# Altium PCB AT_START_WB415_V1.1.pcbdoc (part 1 of 2)
Units mil, origin at the board's own origin, x right, y up, seen from the top; angles counter-clockwise.
Board outline 4474.57 x 4041.5 mil, 2 copper layers (Top Layer, Bottom Layer); 120 components, 101 nets, 415 pads, 791 vias.
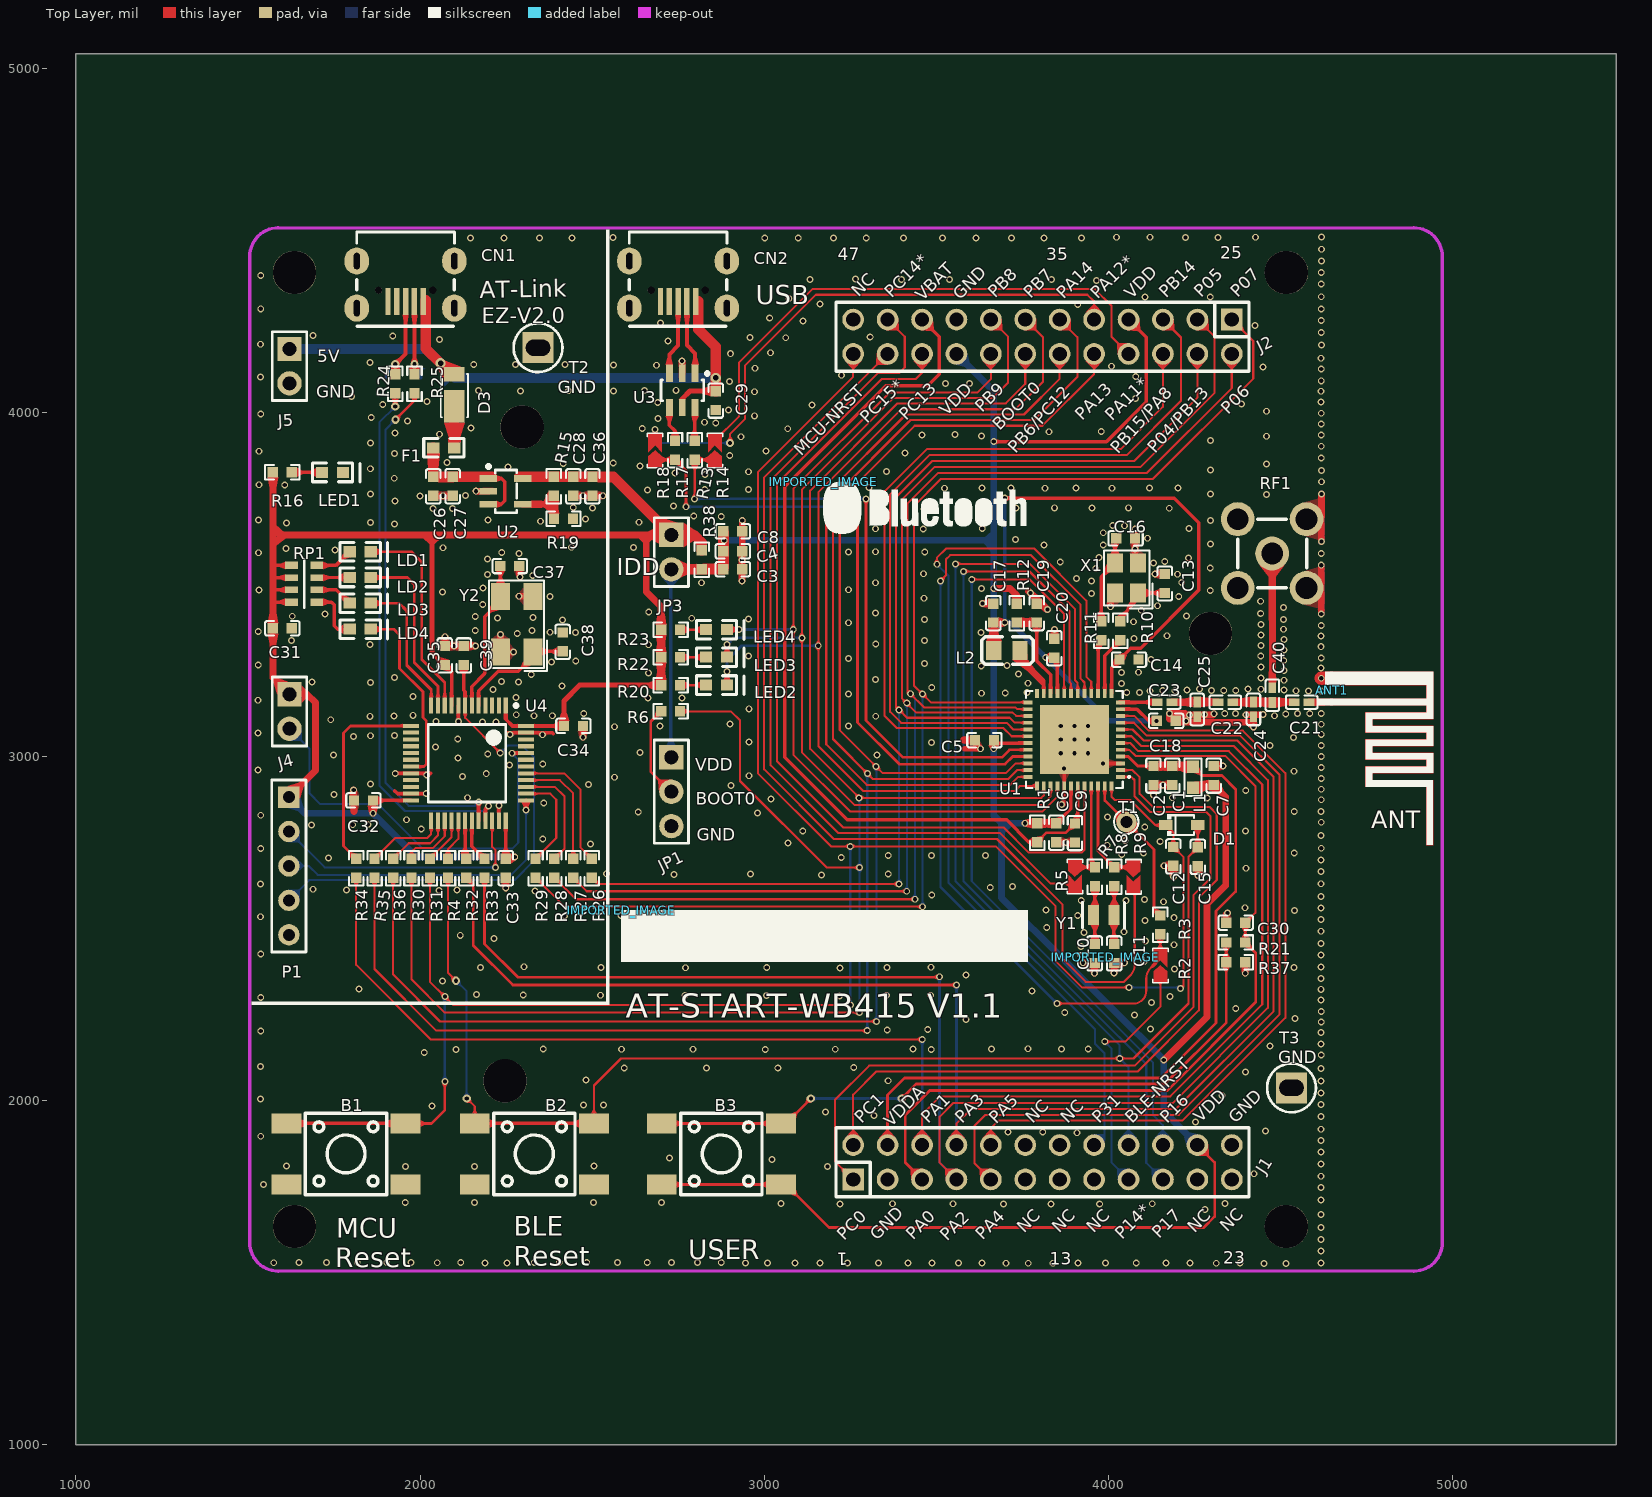
[diagram p0: Top Layer view]
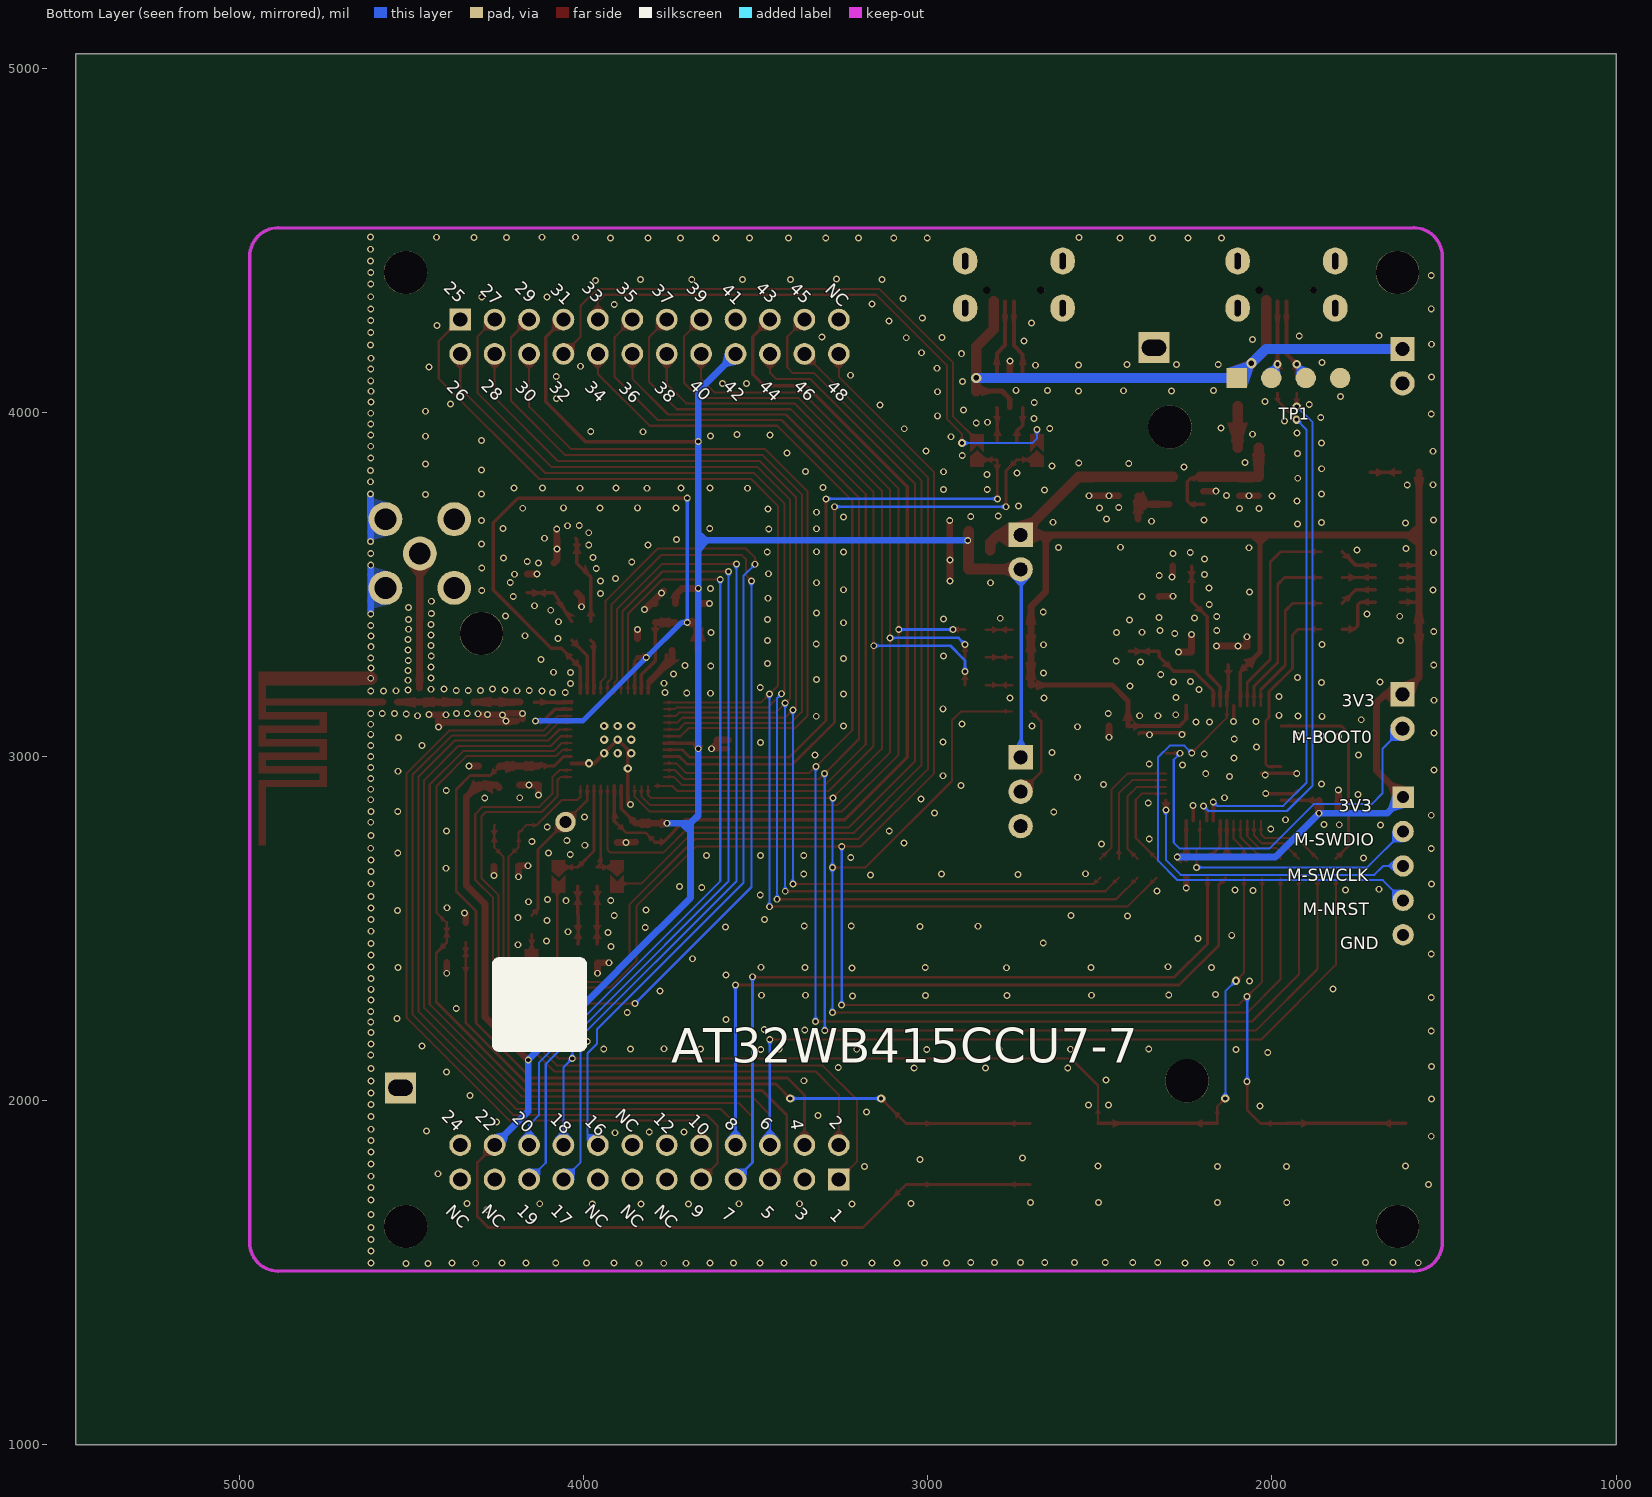
[diagram p1: Bottom Layer view, seen from below]

## Layer stack, top to bottom
Top Layer: signal copper (thickness not stored)
Dielectric: dielectric 12.6, FR-4, Dk 4.8
Bottom Layer: signal copper (thickness not stored)

## Board outline
5474.57,1000 1000,1000 1000,5041.5 5474.57,5041.5

## Components (designator, comment, footprint, x,y, rotation, side; value= is the part's Value field where it differs from the comment)
ANT1 "AN2051-245" 2.4G_PIFA_ANT_1.0MM_PCB 4648.27,3247 r270 top
B1 "贴片按键6*6*5 黑色" SW-SMD_4P-L6.0-W6.0-P4.50-LS9.0 1784.57,1845.6 r0 top
B2 "贴片按键6*6*5 黑色" SW-SMD_4P-L6.0-W6.0-P4.50-LS9.0 2331.77,1845.6 r0 top
B3 "贴片按键6*6*5 蓝色" SW-SMD_4P-L6.0-W6.0-P4.50-LS9.0 2875.07,1845.6 r180 top
C1 "1uF" 0603_C-M 4185.57,2945 r270 top
C2 "0.1uF" 0603_C-M 4130.57,2945 r270 top
C3 "10uF" 0603_C-M 2908.52,3544.7 r180 top
C4 "4.7uF" 0603_C-M 2908.52,3596.4 r180 top
C5 "0.1uF" 0603_C-M 3639.57,3048 r0 top
C6 "0.1uF" 0603_C-M 3848.57,2779 r90 top
C7 "0.1uF" 0603_C-M 4305.57,2945 r270 top
C8 "0.1uF" 0603_C-M 2908.52,3654.5 r180 top
C9 "0.1uF" 0603_C-M 3902.57,2778 r90 top
C10 "10pF" 0603_C-M 3959.57,2428 r270 top
C11 "10pF" 0603_C-M 4016.57,2428 r270 top
C12 "0.1uF" 0603_C-M 4188.57,2710 r270 top
C13 "NC" 0603_C-M 4163.57,3503 r90 top
C14 "1uF" 0603_C-M 4059.57,3282 r0 top
C15 "0.1uF" 0603_C-M 4259.57,2709 r270 top
C16 "NC" 0603_C-M 4049.57,3634 r0 top
C17 "1uF" 0603_C-M 3665.57,3417 r90 top
C18 "0.1uF" 0603_C-M 4167.57,3104 r180 top
C19 "1uF" 0603_C-M 3791.57,3417 r270 top
C20 "0.1uF" 0603_C-M 3842.57,3315 r90 top
C21 "0R" C0402 4561.37,3158.4 r180 top
C22 "12pF" C0402 4339.47,3158.2 r0 top
C23 "15pF" C0402 4163.27,3158.4 r0 top
C24 "NC" C0402 4421.17,3137.1 r270 top
C25 "0.3pF" C0402 4257.57,3137 r270 top
C26 "10uF" 0603_C-M 2037.97,3785.3 r90 top
C27 "0.1uF" 0603_C-M 2094.37,3785.6 r90 top
C28 "10uF" 0603_C-M 2445.17,3785.3 r90 top
C29 "0.1uF" 0603_C-M 2858.87,4034.5 r270 top
C30 "0.1uF" 0603_C-M 4369.77,2517.7 r180 top
C31 "4.7uF" 0603_C-M 1599.67,3372.7 r180 top
C32 "0.1uF" 0603_C-M 1835.27,2872.7 r0 top
C33 "0.1uF" 0603_C-M 2248.67,2675.8 r90 top
C34 "0.1uF" 0603_C-M 2445.47,3089.2 r180 top
C35 "0.1uF" 0603_C-M 2071.47,3293.9 r270 top
C36 "0.1uF" 0603_C-M 2500.67,3785.3 r90 top
C37 "22pF" 0603_C-M 2260.47,3553.8 r0 top
C38 "22pF" 0603_C-M 2413.97,3333.3 r270 top
C39 "0.1uF" 0603_C-M 2126.57,3293.9 r270 top
C40 "NC" C0402 4476.17,3178.6 r270 top
CN1 "USB_micro B" USB_MIC_DIP 1957.75,4322.6 r90 top
CN2 "USB_micro B" USB_MIC_DIP 2749.57,4322.6 r90 top
D1 "NC" SOD-323_L1.8-W1.3-LS2.5-RD 4212.58,2801 r0 top
D3 "DFLS130L-7" POWERDI-123_L2.8-W1.8-LS3.7-RD 2099.52,4064.5 r90 top
F1 "SMD0603B050TF" R0603 2099.27,3897.2 r180 top
IMPORTED_IMAGE "IMPORTED_IMAGE" IMPORTED_IMAGE 3991.12,2417.55 r0 top
IMPORTED_IMAGE "IMPORTED_IMAGE" IMPORTED_IMAGE 2584.87,2553.3 r0 top
IMPORTED_IMAGE "IMPORTED_IMAGE" IMPORTED_IMAGE 3170.82,3798.1 r0 top
J1 "HDR-M-2.54_2x12" HDR-TH_24P-P2.54-V-F-R2-C12-S2.54 3808.15,1821.46 r0 top
J2 "HDR-M-2.54_2x12" HDR-TH_24P-P2.54-V-F-R2-C12-S2.54 3808.15,4220 r180 top
J4 "1X2P,Male,DIP_2.54" HDR1X2 1620.37,3181.1 r270 top
J5 "1X2P,Male,DIP_2.54" HDR1X2 1620.37,4184.4 r270 top
JP1 "Header 1x3" "HEADER 1X3" 2729.87,2998.1 r270 top
JP3 "Jumper 1x2P" "HEADER 1X2" 2729.87,3644.1 r270 top
L1 "0.2A,600R@100Mhz" 0603_L 4245.57,2940 r90 top
L2 "2.2uH" L0805 3704.92,3308.47 r180 top
LD1 "RED" LED0603 1795.27,3595.04 r0 top
LD2 "GREEN" LED0603 1795.27,3520.3 r0 top
LD3 "BLUE" LED0603 1795.27,3445.6 r0 top
LD4 "YELLOW" LED0603 1795.27,3369.9 r0 top
LED1 "RED" LED0603 1714.87,3825.4 r0 top
LED2 "RED" LED0603 2830.57,3207.7 r0 top
LED3 "YELLOW" LED0603 2830.57,3288.8 r0 top
LED4 "GREEN" LED0603 2830.57,3368.7 r0 top
P1 "HDR-M-2.54_1x5" HDR-M-2.54_1X5 1618.57,2682.3 r270 top
R1 "0R" 0603_R-M 3792.57,2779 r270 top
R2 "NC" SB-PAD 4150.67,2393.2 r90 top
R3 "33R" 0603_R-M 4150.67,2511 r90 top
R4 "330R" 0603_R-M 2080.97,2675.8 r270 top
R5 "NC" SB-PAD 3902.57,2652 r270 top
R6 "10K" 0603_R-M 2727.58,3131.7 r180 top
R7 "0R" 0603_R-M 3960.57,2651 r90 top
R8 "0R" 0603_R-M 4016.57,2651 r90 top
R9 "NC" SB-PAD 4072.57,2651 r270 top
R10 "0R" 0603_R-M 4034.57,3365.5 r270 top
R11 "0R" 0603_R-M 3978.57,3365.5 r270 top
R12 "0R" 0603_R-M 3733.57,3417 r90 top
R13 "22R" 0603_R-M 2797.57,3890 r270 top
R14 "NC" SB-PAD 2856.57,3889.5 r90 top
R15 "47K" 0603_R-M 2388.47,3785.3 r270 top
R16 "1K" 0603_R-M 1599.67,3826.4 r180 top
R17 "22R" 0603_R-M 2740.57,3890 r270 top
R18 "NC" SB-PAD 2682.57,3889.5 r90 top
R19 "15K" 0603_R-M 2416.47,3690.8 r0 top
R20 "1K" 0603_R-M 2727.58,3207.7 r0 top
R21 "1K" 0603_R-M 4369.77,2460 r0 top
R22 "1K" 0603_R-M 2727.58,3288.8 r0 top
R23 "1K" 0603_R-M 2727.58,3368.7 r0 top
R24 "0R" 0603_R-M 1927.57,4083 r90 top
R25 "0R" 0603_R-M 1983.57,4083.6 r90 top
R26 "330R" 0603_R-M 2498.57,2675.79 r270 top
R27 "330R" 0603_R-M 2444.47,2675.79 r270 top
R28 "330R" 0603_R-M 2390.07,2675.79 r270 top
R29 "330R" 0603_R-M 2335.27,2675.79 r270 top
R30 "330R" 0603_R-M 1974.87,2675.8 r270 top
R31 "330R" 0603_R-M 2028.37,2675.8 r270 top
R32 "330R" 0603_R-M 2133.57,2675.8 r270 top
R33 "330R" 0603_R-M 2186.87,2675.8 r270 top
R34 "330R" 0603_R-M 1813.97,2675.8 r270 top
R35 "330R" 0603_R-M 1867.47,2675.8 r270 top
R36 "330R" 0603_R-M 1921.37,2675.8 r270 top
R37 "10K" 0603_R-M 4369.77,2402.8 r180 top
R38 "0R" 0603_R-M 2817.77,3572.2 r90 top
RF1 "KH-SMA-KE-Z" SMA-TH_KH-SMA-KE-Z 4475.47,3590.1 r90 top
RP1 "1K" 0603*4,8P4R 1626.57,3555.4 r270 top
T1 "Testpoint1" PAD1 4052.07,2810 r0 top
T2 "Testpoint" TESTHOOK 2342.47,4188.2 r0 top
T3 "Testpoint" TESTHOOK 4531.67,2037.6 r0 top
TP1 "1X4P_2.54F" "HDR1X4 - TOP" 2101.57,4100 r0 bottom
U1 "AT32WB415CCU7-7" QFN-48_L7.0-W7.0-P0.50-TL-EP5.4 3900.67,3049.29 r180 top
U2 "RT9080N-08GJ5" SOT-23-5 2263.07,3708.1 r0 top
U3 "USBLC6-2SC6" SOT-23-6 2761.57,4064 r90 top
U4 "AT32F403CCT6" "LQFP48 - 2" 2248.67,3148.3 r270 top
X1 "16MHz TZ0233A" OSC-SMD_4P-L3.2-W2.5-BL-OXETDLJANF-0.032768MHZ 4052.57,3519 r90 top
Y1 "32.768KHz" "XTAL_SOP - FC-12M" 3956.57,2540 r0 top
Y2 "8MHz" OSC-SMD_4P-L5.0-W3.2-BL 2280.13,3384.5 r90 top

## Footprints (in the part's own frame and the unit in brackets; to place one, negate y for a bottom-side part, rotate by r counter-clockwise, add the part's x,y. Pads: shape width x height; smd on the part's side, far side on the other; paste and mask are expansions set on the pad)
2.4G_PIFA_ANT_1.0MM_PCB [mm]
  rect 0.5x0.2 smd paste-0.5 mask-0.5: 1(2.25,0)
  rect 1x0.2 smd paste-1 mask-1: 2(0.5,0)
  Top Layer region: 0,0 0,7.5 1,7.5 1,0 0.5,0
  Top Layer region: 1,7.5 3.5,7.5 3.5,7 1,7
  Top Layer region: 2,7 2,0 2.5,0 2.5,7
  Top Layer region: 3,7.5 3,2.5 3.5,2.5 3.5,7.5
  Top Layer region: 4.5,3 3,3 3,2.5 4.5,2.5 4.5,3
  Top Layer region: 4,7.5 4,2.5 4.5,2.5 4.5,7.5
  Top Layer region: 5.5,7.5 4,7.5 4,7 5.5,7 5.5,7.5
  Top Layer region: 5.5,2.5 5.5,7.5 5,7.5 5,2.5
  Top Layer region: 6.5,3 5,3 5,2.5 6.5,2.5 6.5,3
  Top Layer region: 6,7.5 6,2.5 6.5,2.5 6.5,7.5
  Top Layer region: 7.5,7.5 6,7.5 6,7 7.5,7 7.5,7.5
  Top Layer region: 7.5,2.5 7.5,7.5 7,7.5 7,2.5
  Top Layer region: 8.5,3 7,3 7,2.5 8.5,2.5 8.5,3
  Top Layer region: 8,7.5 8,2.5 8.5,2.5 8.5,7.5
  Top Layer region: 8,7.5 8,7 12.8,7 12.8,7.5
0603*4,8P4R [mm]
  rect 0.55x0.95 smd paste+0 mask+0.102: 1(0,0) 4(2.7,0) 5(2.7,1.85) 8(0,1.85)
  rect 0.5x0.95 smd paste+0 mask+0.102: 2(0.9,0) 3(1.8,0) 6(1.8,1.85) 7(0.9,1.85)
  silkscreen extent -0.43,0.94 3.1,0.94
0603_C-M [mil]
  rect 30x30 smd paste+0 mask+4: 1(27.5,0) 2(-27.5,0)
  silkscreen extent -50,-21 50,21
0603_L [mm]
  rect 0.93x0.9 smd paste+0 mask+0.102: 1(-0.77,0) 2(0.77,0)
  silkscreen extent -1.4,-0.64 1.4,0.64
0603_R-M [mil]
  rect 30x30 smd paste+0 mask+4: 1(27.5,0) 2(-27.5,0)
  silkscreen extent -50,-21 50,21
C0402 [mm]
  rect 0.79x0.54 smd paste-100 mask+0.051: 1(-0.545,0) 2(0.545,0)
  silkscreen extent -1.17,-0.5 1.17,0.5
HDR1X2 [mm]
  rect 1.8x1.8 hole 1 slot 1.005 at 0 deg paste+0 mask+0.102: 1(0,0)
  round 1.8 hole 1 slot 1.005 at 0 deg paste+0 mask+0.102: 2(2.54,0)
  silkscreen extent -1.27,-1.27 3.81,1.27
"HDR1X4 - TOP" [mm]
  rect 1.5x1.5 smd paste+0 mask+0.102: 1(0,0)
  round 1.5 smd paste+0 mask+0.102: 2(-2.54,0) 3(-5.08,0) 4(-7.62,0)
HDR-M-2.54_1X5 [mil]
  rect 62x62 hole 35 paste+0 mask+2: 1(-200,0)
  round 62 hole 35 paste+0 mask+2: 2(-100,0) 3(0,0) 4(100,0) 5(200,0)
  silkscreen extent -250,-50 250,50
HDR-TH_24P-P2.54-V-F-R2-C12-S2.54 [mm]
  rect 1.6x1.6 hole 1.05 paste+0 mask+0.051: 1(-13.97,-1.27)
  round 1.6 hole 1.05 paste+0 mask+0.051: 2(-13.97,1.27) 3(-11.43,-1.27) 4(-11.43,1.27) 5(-8.89,-1.27) 6(-8.89,1.27) 7(-6.35,-1.27) 8(-6.35,1.27) 9(-3.81,-1.27) 10(-3.81,1.27) 11(-1.27,-1.27) 12(-1.27,1.27) 13(1.27,-1.27) 14(1.27,1.27) 15(3.81,-1.27) 16(3.81,1.27) 17(6.35,-1.27) 18(6.35,1.27) 19(8.89,-1.27) 20(8.89,1.27) 21(11.43,-1.27) 22(11.43,1.27) 23(13.97,-1.27) 24(13.97,1.27)
  silkscreen extent -15.24,-2.54 15.24,2.54
"HEADER 1X2" [mm]
  rect 1.8x1.8 hole 1 slot 1.005 at 0 deg paste+0 mask+0.102: 1(0,0)
  round 1.8 hole 1 slot 1.005 at 0 deg paste+0 mask+0.102: 2(2.54,0)
  silkscreen extent -1.27,-1.27 3.81,1.27
"HEADER 1X3" [mm]
  rect 1.8x1.8 hole 1 slot 1.005 at 0 deg paste+0 mask+0.102: 1(0,0)
  round 1.8 hole 1 slot 1.005 at 0 deg paste+0 mask+0.102: 2(2.54,0) 3(5.08,0)
  silkscreen extent -1.27,-1.27 6.35,1.27
IMPORTED_IMAGE [mil]
L0805 [mil]
  rect 44.59x54.21 smd paste-3937.01 mask+2: 1(-38.05,0) 2(38.04,0)
  silkscreen extent -77,-40 73,40
LED0603 [mil]
  rect 36x32 smd paste+0 mask+4: 1(-0.04,0.2) 2(60.96,0.2)
  silkscreen extent -28,-28 110,27
"LQFP48 - 2" [mm]
  rect 1.2x0.3 smd paste+0 mask+0.102: 1(0,0) 2(0,-0.5) 3(0,-1) 4(0,-1.5) 5(0,-2) 6(0,-2.5) 7(0,-3) 8(0,-3.5) 9(0,-4) 10(0,-4.5) 11(0,-5) 12(0,-5.5) 25(8.5,-5.5) 26(8.5,-5) 27(8.5,-4.5) 28(8.5,-4) 29(8.5,-3.5) 30(8.5,-3) 31(8.5,-2.5) 32(8.5,-2) 33(8.5,-1.5) 34(8.5,-1) 35(8.5,-0.5) 36(8.5,0)
  rect 0.3x1.2 smd paste+0 mask+0.102: 13(1.5,-7) 14(2,-7) 15(2.5,-7) 16(3,-7) 17(3.5,-7) 18(4,-7) 19(4.5,-7) 20(5,-7) 21(5.5,-7) 22(6,-7) 23(6.5,-7) 24(7,-7) 37(7,1.5) 38(6.5,1.5) 39(6,1.5) 40(5.5,1.5) 41(5,1.5) 42(4.5,1.5) 43(4,1.5) 44(3.5,1.5) 45(3,1.5) 46(2.5,1.5) 47(2,1.5) 48(1.5,1.5)
  silkscreen extent -0.12,-5.71 7.11,0.89
OSC-SMD_4P-L3.2-W2.5-BL-OXETDLJANF-0.032768MHZ [mm]
  rect 1.4x1.2 smd paste+0 mask+0.051: 1(-1.1,-0.85) 2(1.1,-0.85) 3(1.1,0.85) 4(-1.1,0.85)
  silkscreen extent -2.26,-1.91 2.03,1.68
OSC-SMD_4P-L5.0-W3.2-BL [mm]
  rect 2x1.4 smd paste+0 mask+0.051: 1(-2.05,-1.2) 2(2.05,-1.2) 3(2.05,1.2) 4(-2.05,1.2)
  silkscreen extent -3.46,-2.26 3.24,2.03
PAD1 [mm]
  round 1.5 hole 0.9 paste+0 mask+0.051: 1(0,0)
POWERDI-123_L2.8-W1.8-LS3.7-RD [mm]
  rect 2.4x1.5 smd paste+0 mask+0.051: 1(-1.187,0)
  rect 1.05x1.5 smd paste+0 mask+0.051: 2(1.187,0)
  silkscreen extent -2,-1 1.2,1
QFN-48_L7.0-W7.0-P0.50-TL-EP5.4 [mm]
  rect 0.665x0.28 smd paste+0 mask+0.051: 1(-3.408,2.75) 2(-3.408,2.25) 3(-3.408,1.75) 4(-3.408,1.25) 5(-3.408,0.75) 6(-3.408,0.25) 7(-3.408,-0.25) 8(-3.408,-0.75) 9(-3.408,-1.25) 10(-3.408,-1.75) 11(-3.408,-2.25) 12(-3.408,-2.75) 25(3.408,-2.75) 26(3.408,-2.25) 27(3.408,-1.75) 28(3.408,-1.25) 29(3.408,-0.75) 30(3.408,-0.25) 31(3.408,0.25) 32(3.408,0.75) 33(3.408,1.25) 34(3.408,1.75) 35(3.408,2.25) 36(3.408,2.75)
  rect 0.28x0.665 smd paste+0 mask+0.051: 13(-2.75,-3.408) 14(-2.25,-3.408) 15(-1.75,-3.408) 16(-1.25,-3.408) 17(-0.75,-3.408) 18(-0.25,-3.408) 19(0.25,-3.408) 20(0.75,-3.408) 21(1.25,-3.408) 22(1.75,-3.408) 23(2.25,-3.408) 24(2.75,-3.408) 37(2.75,3.408) 38(2.25,3.408) 39(1.75,3.408) 40(1.25,3.408) 41(0.75,3.408) 42(0.25,3.408) 43(-0.25,3.408) 44(-0.75,3.408) 45(-1.25,3.408) 46(-1.75,3.408) 47(-2.25,3.408) 48(-2.75,3.408)
  rect 5.1x5.1 smd paste+0 mask+0.051: 49(0,0)
  silkscreen extent -4.11,-3.58 3.58,3.58
R0603 [mil]
  rect 36x32 smd paste+0 mask+4: 1(-0.04,0.2) 2(60.96,0.2)
  silkscreen extent -28,-27 89,27
SB-PAD [mil]
  Top Layer region: -47.24,-19.68 -47.24,19.69 -16.45,19.68 1,0 -17.05,-19.68
  Top Layer region: -4.69,19.68 15,0 -4.69,-19.69 47.24,-19.68 47.24,19.69
  silkscreen extent -50,-23 50,23
SMA-TH_KH-SMA-KE-Z [mm]
  round 2.5 hole 1.6 paste+0 mask+0.051: 1(-2.54,-2.54) 2(-2.54,2.54) 3(2.54,2.54) 4(2.54,-2.54) 5(0,0)
  silkscreen extent -2.54,-2.54 2.54,2.54
SOD-323_L1.8-W1.3-LS2.5-RD [mm]
  rect 1x0.75 smd paste+0 mask+0.051: 1(-1.173,0) 2(1.173,0)
  silkscreen extent -1.08,-0.8 0.9,0.8
SOT-23-5 [mil]
  rect 50x20 smd paste+0 mask+4: 1(-65,100) 2(-65,63) 3(-65,25) 4(35,25) 5(35,100)
  silkscreen extent -65,1 18,135
SOT-23-6 [mil]
  rect 50x20 smd paste+0 mask+4: 1(50,-37.4) 2(50,0) 3(50,37.4) 4(-50,37.4) 5(-50,0) 6(-50,-37.4)
  silkscreen extent -30,-72 50,62
SW-SMD_4P-L6.0-W6.0-P4.50-LS9.0 [mm]
  rect 2.2x1.5 smd paste+0 mask+0.051: 1(-4.4,2.25) 2(-4.4,-2.25) 3(4.4,2.25) 4(4.4,-2.25)
  silkscreen extent -3,-3 3,3
TESTHOOK [mm]
  rect 2.3x2.3 hole 1.2 slot 1.8 at 0 deg paste+0 mask+0.102: 1(0,0)
  silkscreen extent -1.8,-1.8 1.8,1.8
USB_MIC_DIP [mm]
  rect 2x0.4 smd paste+0 mask+0.102: 1(0,-1.3) 2(0,-0.65) 3(0,0) 4(0,0.65) 5(0,1.3)
  oval 2x1.8 hole 0.45 slot 1.2 at 0 deg paste+0 mask+0.102: 6(-0.495,-3.6) 7(2.975,-3.6) 8(2.975,3.6) 9(-0.495,3.6)
  round 0.5 hole 0.55 unplated paste+0 mask+0.102: MH1(0.825,2) MH2(0.825,-2)
  silkscreen extent -1.82,-3.6 5.13,3.6
"XTAL_SOP - FC-12M" [mm]
  rect 0.8x1.5 smd paste+0 mask+0.102: 1(0,0) 2(1.5,0)
  silkscreen extent -0.81,-0.99 2.29,0.94

## Free pads (board coordinates)
  round 125.98 hole 125.98 unplated paste+0: ""(1634.92,1634.92) ""(1634.92,4406.57) ""(2246.34,2057.75) ""(2296.34,3957.75) ""(4296.34,3357.75) ""(4516.81,1634.92) ""(4516.82,4406.57)

## Via types
v1: diameter 20, hole 12, Top Layer to Bottom Layer, tented both sides, 769 vias
v2: diameter 24, hole 12, Top Layer to Bottom Layer, tented both sides, 20 vias
v3: diameter 30, hole 16, Top Layer to Bottom Layer, tented both sides, 2 vias

## Nets (pads, with @x,y where several pads share a name; then routed paths per layer and width w, separated by ;. In a path a pad name is that pad's centre, name@x,y a point inside that pad or via, vN(x,y) a via of type N, cw(c..) or ccw(c..) an arc to the next point about the centre after c; other vN are vias at no path point)
3V3: C28.1 C31.1 C32.1 C33.1 C34.1 C35.1 C36.1 J4.1 JP3.1 P1.1 R15.2 R16.1 R20.2 R22.2 R23.2 R38.1 RP1.1 RP1.2 RP1.3 RP1.4 U2.5 U4.1 U4.9 U4.24 U4.36 U4.48 | length 5880
  Top Layer w10: 1572.27,3449.1 RP1.4@1626.57,3449.1 ; 1572.27,3484.53 RP1.3@1626.57,3484.53 ; 1572.27,3519.97 RP1.2@1626.57,3519.97 ; 1572.27,3555.4 RP1.1@1626.57,3555.4 ; C32.1@1862.75,2872.69 U4.24@1973.05,2872.69 ; C35.1@2071.47,3266.4 2091.16,3246.77 U4.9@2091.19,3148.3 ; C33.1@2248.64,2703.34 U4.36@2248.64,2813.63
  Top Layer w11: U4.1@2248.67,3148.3 2248.67,3108.7 2268.13,3089.24 U4.48@2307.73,3089.24 C34.1@2417.97,3089.2
  Top Layer w15: 2012.59,3641.47 2034.67,3620.2 2057.36,3640.7 ; 2034.67,3642.9 2034.67,3303.2 C35.1@2071.47,3266.4 ; C34.1@2417.97,3089.2 2417.97,3161.9 2463.77,3207.7 R20.2@2700.08,3207.7
  Top Layer w20: R16.1@1572.17,3826.4 1572.27,3826.3 1572.27,3229.2 J4.1@1620.37,3181.1 1671.07,3181.1 1695.37,3156.8 1695.37,2959.1 P1.1@1618.57,2882.3 ; 1572.32,3617.7 1602.02,3640.7 ; 1572.37,3668.6 1602.37,3642.4 ; 1572.57,3664 1592.51,3644 2633.87,3644 ; v1(1862.77,2835.4) C32.1@1862.77,2872.7 ; C33.1@2248.64,2703.34 2253.4,2708.1 v1(2274.77,2708.1) ; R20.2@2700.08,3207.7 2700.08,3436.79 2656.87,3480 2656.87,3626 ; 2633.87,3644 2633.97,3644.1 JP3.1@2729.87,3644.1 2674.97,3644.1 2656.87,3626 ; 2633.87,3644 2638.87,3644 2656.87,3626
  Top Layer w30: U2.5@2287.57,3813.1 2302.87,3812.9 C36.1@2500.68,3812.9 ; C36.1@2500.67,3812.8 2561.17,3812.8 JP3.1@2729.87,3644.1 2795.67,3644.1 2817.77,3622 R38.1@2817.77,3599.7
  Bottom Layer w20: P1.1@1618.57,2882.3 1665.47,2835.4 v1(1862.77,2835.4) 1990.07,2708.1 v1(2274.77,2708.1)
ANT: C23.1 U1.12 | length 107.3
  Top Layer w11: U1.12@4034.82,3157.56 C23.1@4142.11,3158
B3_2: B3.2 B3.4 R21.2 R37.1 | length 1994.5
  Top Layer w7.87: B3.4@2701.84,1934.17 B3.2@3048.29,1934.17 3062.75,1934.18 v2(3135.17,2006.6)
  Top Layer w8: v2(3399.17,2006.6) 3441.07,2048.5 4163.37,2048.5 4342.27,2227.4 R21.2@4342.27,2460
  Bottom Layer w8: v2(3135.17,2006.6) v2(3399.17,2006.6)
BLE_NRST: B2.1 B2.3 C15.2 D1.2 J1.18 R4.1 U1.18 | length 6106
  Top Layer w6: R4.1@2080.97,2648.3 2080.97,2371.8 v2(2104.17,2348.6) ; v2(2135.47,2007) 2158.54,1983.93 B2.1@2158.54,1934.17 ; B2.3@2505,1934.14 2505,2044.43 2583.57,2123 4072.57,2123 4232.37,2282.8 4232.37,2709.3 C15.2@4259.57,2736.5 ; v1(3555.57,3560) 3771.57,3560 3903.07,3428.5 3903.07,3221.2 3910.51,3213.76 U1.18@3910.51,3183.44
  Top Layer w8: D1.2@4258.75,2801 4259.57,2800.16 C15.2@4259.57,2736.5
  Top Layer w10: B2.1@2158.54,1934.14 B2.3@2505,1934.14
  Bottom Layer w6: v2(2104.17,2348.6) 2135.07,2317.7 2135.07,2007 v2(2135.47,2007) ; v1(3555.57,3560) 3555.57,2638 4032.57,2161 v1(4032.57,2123) 4058.15,2097.42 J1.18@4058.15,1871.46
BOOT0: J2.14 R6.2 R30.1 U1.38 | length 5432.5
  Top Layer w6: R30.1@1974.87,2647.3 1974.87,2353 2071.87,2256 v1(3276.77,2256) ; R6.2@2755.08,3131.7 2902.97,3131.7 2929.37,3105.3 2929.37,2929.2 3181.37,2677.7 v1(3276.37,2677.7) ; J2.14@3758.15,4170 3758.16,4082.89 3701.47,4026.2 3387.07,4026.2 3133.27,3772.4 3133.27,3022.3 v1(3275.57,2880) 3804.57,2880 3812.57,2888 U1.38@3812.57,2915
  Bottom Layer w6: v1(3275.57,2880) 3276.77,2878.8 v1(3276.77,2256)
C10_2: C10.2 R7.2 Y1.1 | length 168.4
  Top Layer w10: C10.2@3959.57,2455.5 3960.57,2456.5 R7.2@3960.57,2623.5
C11_2: C11.2 R8.2 Y1.2 | length 168.8
  Top Layer w10: C11.2@4016.57,2455.5 4015.63,2456.44 Y1.2@4015.63,2540 4016.57,2540.94 R8.2@4016.57,2623.5
C21_1: ANT1.1 C21.1 | length 65.4
  Top Layer w20: C21.1@4582.83,3158.4 ANT1.1@4648.27,3158.42
C25_1: C22.1 C23.2 C25.1 | length 133.4
  Top Layer w20: C23.2@4184.73,3158.4 4257.51,3158.4 C25.1@4257.57,3158.46
  Top Layer w21: C25.1@4257.57,3158.46 4317.75,3158.46 C22.1@4318.01,3158.2
C27_1: C26.1 C27.1 F1.2 U2.1 U2.3 | length 413.2
  Top Layer w10: U2.3@2198.07,3733.1 2235.87,3733.1 2245.97,3743.2 2245.97,3798.3 2235.57,3808.7 U2.1@2198.07,3808.1
  Top Layer w30: F1.2@2038.31,3897 C26.1@2037.97,3812.8 2193.37,3812.8 U2.1@2207.57,3812.8
C40_1: C40.1 RF1.5 | length 390
  Top Layer w21: RF1.5@4475.46,3590.09 C40.1@4476.17,3200.06
C40_2: C21.2 C22.2 C24.1 C40.2 | length 179.2
  Top Layer w21: C22.2@4360.93,3158.2 4420.81,3158.2 C24.1@4421.17,3158.56 4539.75,3158.56 C21.2@4539.91,3158.4
F1_1: D3.1 F1.1 | length 120.8
  Top Layer w30: F1.1@2099.31,3897 D3.1@2099.52,4017.75
GND: ANT1.2 B1.2 B1.4 B2.2 B2.4 C1.1 C2.1 C3.2 C4.2 C5.2 C6.2 C7.2 C8.2 C9.2 C10.1 C11.1 C12.1 C13.1 C14.1 C15.1 C16.1 C17.1 C18.2 C19.2 C20.1 C24.2 C25.2 C26.2 C27.2 C28.2 C29.1 C30.1 C31.2 C32.2 C33.2 C34.2 C35.2 C36.2 C37.1 C38.2 C39.2 CN1.5 CN1.6 CN1.7 CN1.8 CN1.9 CN2.5 CN2.6 CN2.7 CN2.8 CN2.9 J1.3 J1.24 J2.17 J5.2 JP1.3 LED1.2 P1.5 R19.1 R37.2 RF1.1 RF1.2 RF1.3 RF1.4 T2.1 T3.1 TP1.4 U1.3 U1.24 U1.41 U1.49 U2.2 U3.2 U4.8 U4.20 U4.23 U4.35 U4.47 X1.2 X1.4 Y2.2 Y2.4 | length 3538.7
  Top Layer w10: 1925.37,2901.4 1934.38,2892.39 U4.23@1973.08,2892.39 v1(2017.67,2892.3) ; v1(1927.47,2951.4) 1973.03,2951.4 U4.20@1973.08,2951.45 2030.27,2951.45 ; U4.8@2110.87,3148.3 2111.07,3148.1 v1(2111.07,3102.2) ; U4.35@2228.97,2813.66 v1(2228.97,2857.7) ; v1@2253.47,3069.56 U4.47@2307.72,3069.56 2384.41,3069.56 2387.17,3066.8
  Top Layer w11: v1(3863.37,2860.4) 3870.77,2860.4 U1.41@3871.14,2915.13 v2(3871.14,2965.53) 3871.14,3019.76 v2(3900.67,3049.29) 3969.56,2980.4 v2(3984.27,2980.4) U1.3@4034.82,2980.39
  Top Layer w17: 3581.37,3022.8 v1(3627.97,3022.8)
  Top Layer w19.68: 4177.57,3109 v1(4177.57,3125.7) 4221.07,3125.7 4225.47,3121.3 v1(4234.87,3121.3) 4303.37,3121.3 v1(4306.77,3124.7) ; 4214.67,3100 4406.97,3100 v1(4421.37,3085.6) C24.2@4421.17,3115.64 ; C30.1@4342.27,2517.7 4342.27,2542.8 v1(4345.37,2545.9) ; v1(4397.27,2370.6) R37.2@4397.27,2402.8 ; v1(4398.97,3121.8) 4447.97,3121.8 v1(4448.57,3122.4) ; v1(4618.17,3556.2) v1(4618.27,3414.8) ; v1(4618.37,3625) v1(4618.47,3763)
  Top Layer w20: v1(1806.87,2902.7) 1806.87,2873.6 C32.2@1807.77,2872.7 1807.77,2841 ; C26.2@2037.97,3757.8 C27.2@2094.37,3758.1 ; v1(2072.47,3348.4) 2072.47,3322.4 C35.2@2071.47,3321.4 C39.2@2126.57,3321.4 2126.97,3321.8 v1(2160.37,3321.8) ; v1(2162.17,3771.2) U2.2@2198.07,3771.1 ; v1(2233.17,3354.3) 2233.17,3304.07 Y2.4@2232.89,3303.79 v1(2271.67,3303.8) ; v1(2248.67,2617.8) C33.2@2248.67,2648.3 ; v1(2287.57,3465.9) 2326.68,3465.9 Y2.2@2327.38,3465.21 ; v1@2287.97,3527.3 C37.1@2287.97,3553.8 ; C28.2@2445.17,3757.8 v1(2473.01,3757.8) v1(2531.47,3757.8) ; v1(2472.97,3056.3) C34.2@2472.97,3089.2 ; v1(2761.27,4149.5) U3.2@2761.57,4114 ; v1(2935.47,3510) v1(2935.97,3685.6) ; 3579.17,3048 C5.2@3612.07,3048 3612.07,3038.7 v1(3627.97,3022.8) ; v1(3634.37,3444.5) C17.1@3665.57,3444.5 ; v1@3766.87,3480.7 3767.57,3480.7 v1(3772.87,3475.4) 3820.57,3427.7 v1(3822.27,3427.7) 3805.47,3444.5 C19.2@3791.57,3444.5 ; C20.1@3842.57,3342.5 v1(3842.57,3369) ; C6.2@3848.57,2751.5 v1(3876.06,2750.99) C9.2@3902.57,2750.5 ; v1(3925.97,2401) 3959.07,2401 C10.1@3959.57,2400.5 v1(3959.07,2370.7) ; v1(4006.07,3435.6) 4006.07,3462.66 X1.4@4019.1,3475.69 ; v1(4016.47,2371.1) 4016.57,2371.2 C11.1@4016.57,2400.5 v1(4046.47,2401.1) ; v1(4077.57,3660.9) 4077.57,3634.5 C16.1@4077.07,3634 v1(4077.07,3602.91) 4077.07,3571.27 X1.2@4086.03,3562.31 ; v1(4130.47,2888.9) C2.1@4130.57,2917.5 v1(4158.09,2917.5) C1.1@4185.57,2917.5 ; v1(4135.07,3530.5) C13.1@4163.57,3530.5 ; v1(4161.77,2682.8) C12.1@4188.57,2682.5 v1(4188.57,2651) ; C18.2@4195.07,3104 v1(4224.87,3104) ; v1(4259.57,2654.2) C15.1@4259.57,2681.5 ; C7.2@4305.57,2972.5 v1(4332.57,2972.5)
  Top Layer w39.5: v1(4617.97,3227.7) ANT1.2@4648.27,3227.32
  Bottom Layer w19.68: v1(4618.17,3556.2) v1(4618.27,3414.8) ; v1(4618.37,3625) v1(4618.47,3763)
  other v1: 3702.47,1528.1 3766.97,1528.1 3838.27,1528.1 3911.07,1528.5 3991.07,1528.5 4313.17,1528.1 4451.67,1527.6 4516.17,1527.6 1574.67,1529.4 2049.57,1529.4 2188.07,1528.9 2252.57,1528.9 2944.77,1529.2 3009.27,1529.2 3089.07,1528.6 3161.87,1529 3241.87,1529 3331.47,1529.1 3417.47,1529.1 3487.47,1529.1 3563.97,1528.6 3632.47,1529.1 4080.67,1528.6 4166.67,1528.6 4236.67,1528.6 4381.67,1528.6 4617.37,1528.8 1647.47,1529.8 1727.47,1529.8 1817.07,1529.9 1903.07,1529.9 1973.07,1529.9 2118.07,1529.9 2331.37,1529.7 2404.17,1530.1 2484.17,1530.1 2573.77,1530.2 2659.77,1530.2 2729.77,1530.2 2806.27,1529.7 2874.77,1530.2 4617.57,1563.3 4617.17,1596.9 4617.17,1632 4617.57,1669.3 4280.77,1683.9 3219.67,1700.5 3694.57,1700.5 3833.07,1700 3974.37,1700.5 3372.47,1700.9 3548.07,1701 4127.17,1700.9 3048.27,1701.7 4338.17,1702.1 1956.67,1704.1 2701.37,1704.5 2157.67,1704.6 2503.37,1705 4617.77,1712.2 4617.57,1747.7 1545.17,1757.1 4617.47,1780.8 4422.27,1787.9 1957.17,1808.6 2158.17,1808.6 3183.87,1808.9 1611.17,1810.1 2505.37,1810 4617.47,1816.3 3022.57,1829.6 2724.97,1834.1 4617.47,1850.8 4617.77,1884.1 1536.87,1897 3908.57,1907.1 3809.07,1909.1 3707.57,1909.6 4455.87,1912 4617.57,1917.2 4252.37,1938.9 4617.57,1954.3 3318.37,1956.9 3177.67,1967.1 2034.37,1984.4 2474.97,1987.4 2532.87,1988.2 4617.67,1989.5 1536.27,2005.2 4329.47,2015.3 4617.77,2023.1 3359.87,2058.3 4617.87,2057.5 2482.17,2060.3 4398.07,2083.9 4617.37,2094.1 2592.87,2095.3 2832.17,2095.7 3039.17,2095.7 3259.97,2096.3 1536.17,2100.1 4617.97,2133 2011.97,2140.8 2103.67,2149.4 3002.57,2149.2 2357.57,2150 2584.47,2149.7 2792.37,2149.7 3206.07,2149.7 3431.57,2150.3 3484.97,2149.5 3863.77,2150.4 3660.47,2150.8 3765.87,2151.1 3941.07,2151 4469.47,2159.5 4617.67,2164.5 4617.87,2198.4 1536.97,2203 3357.27,2205.9 3474.77,2207.3 4122.37,2209.1 4618.17,2228.8 3586.47,2236.4 4541.77,2239.1 4075.97,2249.3 3872.87,2256.7 4618.07,2259.9 4369.77,2268.3 4124.67,2285.3 4617.87,2292.5 1536.97,2300.1 4178.67,2303.4 3218.77,2304.6 2523.87,2306.5 2769.77,2305.5 3006.07,2305.8 2299.37,2307 3355.07,2306.6 3482.47,2306.6 2163.27,2308.5 3777.47,2319.4 4617.87,2323.9 1822.77,2325.2 2065.27,2348.2 4617.87,2355.7 3586.17,2365 4191.77,2382.4 3219.87,2385.8 2770.87,2386.7 3007.17,2387 4538.87,2387 2175.67,2387.8 2524.97,2387.7 3356.17,2387.8 3484.37,2388.1 4617.87,2388.5 2301.27,2389.3 4102.77,2404 3682.97,2412.8 4617.67,2424 1536.87,2426.6 3920.37,2447.8 4190.57,2453.5 4617.57,2457.1 2664.17,2458.3 4107.47,2464.7 2214.57,2471.1 2116.37,2480.8 3928.37,2488.8 4045.47,2491 4617.57,2492.6 3820.67,2503.8 3587.17,2504.6 3022.77,2506.5 2853.47,2507.1 3222.07,2508 3358.67,2507.8 4106.47,2523.3 3474.37,2526.3 4617.57,2527.1 4190.07,2532 1536.27,2534.8 2419.67,2536.7 3910.67,2537.9 2583.67,2538.7 4540.27,2553.4 3818.17,2554.7 4617.87,2560.4 4396.87,2560.8 4159.57,2578.3 4050.67,2581.4 3920.77,2581.6 4104.87,2584.8 4617.67,2593.5 3486.47,2598.2 2333.97,2610 2054.57,2611.1 1786.37,2612.3 2107.57,2612.1 1688.17,2614.5 3656.47,2620.2 3721.37,2622.8 1536.17,2629.7 4617.67,2630.6 3166.57,2656.1 2738.07,2657.8 3360.17,2658.5 2959.77,2659.1 2541.07,2659.7 4617.77,2665.8 4398.97,2675.8 4617.87,2699.4 1733.87,2705.2 3223.47,2707.1 3642.77,2712.5 3360.17,2713 3486.07,2713.1 4038.47,2715.7 4102.17,2719.5 4539.57,2719.8 1536.97,2732.6 4617.97,2733.8 3996.17,2742.6 2495.27,2746 3068.37,2749 4150.17,2753.5 4048.47,2756.6 2356.07,2760.8 4617.47,2770.4 3111.77,2784.3 4398.27,2783.6 2003.27,2789.5 4105.37,2795.6 1684.67,2801.3 1804.27,2802 1848.77,2803.1 4618.07,2809.3 1960.17,2816.5 3997.17,2825 1536.97,2829.7 2980.57,2835.7 2633.77,2839.2 4539.57,2840.5 4617.77,2840.8 2359.17,2865.5 4617.97,2874.7 3019.47,2877 4185.37,2880.5 4286.87,2879.5 2137.97,2880.6 1749.57,2890 4398.67,2901.4 4618.27,2905.1 2902.67,2916.4 2488.77,2918.8 1856.07,2920.1 4618.17,2936.2 2564.37,2940.1 2122.97,2942.6 2955.77,2944.3 2019.17,2946.1 2192.17,2950.4 4539.27,2957.6 1529.37,2960.6 4617.97,2968.8 2259.87,2976 2356.07,2978.9 2109.67,2996.4 4617.97,3000.2 1748.37,3004.4 3327.27,3004.9 2196.27,3008.1 2638.87,3011.7 2044.77,3028.1 4469.57,3032.5 4617.97,3032 3485.97,3040.6 2955.47,3042.2 2109.17,3051.4 4537.07,3055.1 1806.07,3058.4 1855.87,3060.6 1924.97,3061.1 2261.07,3064 2354.97,3063.6 4617.97,3064.8 1528.77,3068.8 2564.37,3086.7 2696.67,3088.7 3244.97,3089.2 4618.27,3094 2900.57,3095 2181.27,3101.1 2220.77,3101.1 2045.57,3101.7 1740.37,3107.1 1854.67,3117.1 3323.77,3117.4 1923.97,3118.5 2330.97,3118.9 2383.97,3118.9 4482.47,3118.9 1978.97,3120 2279.07,3121.8 4279.27,3122.2 4514.87,3123.4 2475.37,3125.4 4337.67,3125.4 4368.67,3124.9 4549.27,3125 4584.67,3124.9 4617.97,3124.8 2955.37,3138.9 1528.67,3163.7 2661.47,3170.1 2760.97,3169.8 2278.37,3171.5 1978.97,3174.2 3244.27,3181.8 3630.87,3184 3699.97,3184.7 3763.67,3186.4 4052.97,3186.4 4089.57,3186.1 4120.07,3190.9 4580.57,3190.7 4618.07,3190.8 4157.47,3191.6 4193.57,3191.5 4298.97,3192.2 4334.87,3191.7 4369.87,3191.7 4545.07,3191.5 2211.87,3194.5 4227.67,3193.5 4509.37,3193.6 4405.17,3196 4442.77,3195.8 4264.17,3196.7 3486.57,3200.5 2412.27,3204.9 4037.27,3211.9 3766.27,3213.3 1856.17,3215 1686.07,3216.3 2286.07,3217.3 2236.07,3217.8 4509.57,3221.8 3323.07,3224 4442.77,3228.8 1925.47,3230.2 2322.87,3238.9 3738.47,3239.8 2663.57,3243.1 4037.57,3244 4087.57,3245 4509.37,3250.1 4617.57,3257.2 4442.97,3260.9 3630.37,3263 3705.17,3264.8 1529.47,3266.6 3465.07,3270.7 2381.37,3275.2 2452.07,3277.7 4509.17,3279.7 4123.57,3281.9 3244.27,3285.3 4618.07,3286.8 2953.67,3292.3 4442.47,3292 4509.57,3310.1 4617.87,3319.4 2098.27,3321.6 4442.77,3323.3 2663.37,3325 1854.67,3325.6 3323.57,3327.3 1625.77,3337.5 3465.07,3337.9 4509.57,3340.5 4074.57,3343.2 4617.77,3350.5 4170.27,3351.2 4442.77,3353.8 2282.17,3358.2 2376.77,3361.3 2450.87,3360.9 3629.37,3360.6 1529.47,3363.7 2325.37,3366.1 2159.97,3366.9 4508.97,3369.9 4618.07,3380.9 4442.77,3383.8 3244.27,3389.1 4072.97,3392 2413.87,3397.2 3465.07,3397.9 4508.97,3398.6 2954.07,3399.8 2225.07,3402.4 2788.97,3402 2327.47,3404.2 2159.97,3407.2 1628.27,3407.8 4226.97,3408.7 1723.27,3414.9 4442.17,3415.6 3323.07,3417.1 2664.07,3420 4095.27,3425.1 4508.77,3433.1 4142.37,3438.5 2181.97,3441.5 4442.17,3451.4 3464.37,3460 2377.07,3465.6 4204.07,3465.7 3950.67,3474.4 2064.97,3478.7 4295.67,3483 1531.37,3484 3244.37,3484.9 3631.27,3488.7 2182.67,3489.6 2817.27,3505.2 3322.87,3505.1 4212.67,3505.9 3950.57,3510.7 3907.37,3517.8 2289.67,3522.1 2327.27,3526.2 2196.17,3529.5 4200.87,3529.9 3462.97,3531.2 3963.07,3546.3 4295.67,3547.5 4131.07,3562.7 3859.87,3565.2 4163.47,3567 2935.57,3571.2 2195.27,3574.6 4232.07,3576.6 3972.77,3578.8 2287.57,3590.4 4618.27,3589.8 1530.77,3592.2 2237.17,3592.8 3244.37,3594.4 3322.87,3595.3 3466.17,3594.6 1752.97,3600.1 1610.27,3604.3 2066.07,3607 2440.17,3608.2 2620.37,3607.8 3812.57,3614.4 3984.57,3615.1 4296.67,3617.5 3729.97,3630.6 4113.67,3634.4 3984.57,3650.6 3323.47,3662 3461.67,3661.8 3633.07,3662.5 4233.57,3662.4 4046.87,3670.9 4012.37,3671.7 1925.57,3676 1611.97,3679.3 1856.07,3680.2 2635.97,3680.8 2350.07,3683.7 4296.17,3686 1530.67,3687.1 2196.97,3687.2 2480.67,3690.5 3245.07,3696.2 2874.67,3697.9 2794.87,3699.3 3322.67,3710 2037.17,3720.5 3463.67,3719.8 2094.37,3721.3 2500.67,3722.4 3731.27,3722.5 3951.77,3722.4 4176.37,3721.6 3842.57,3722.9 4058.07,3722.9 2444.87,3723.5 2735.97,3727.7 1926.47,3742.7 1999.87,3756.8 2065.87,3757.9 2131.27,3758.9 4459.57,3761.1 4296.67,3762.5 1855.57,3763.1 2660.47,3774.2 2826.87,3775.9 2953.67,3775.9 3522.97,3779.6 3632.47,3780.2 3716.27,3780.1 3815.07,3779.6 3905.77,3780 4009.87,3779.8 4119.27,3780.5 4202.37,3780.5 3304.27,3781.7 1531.47,3790 1606.47,3789.5 4618.47,3798.5 1924.87,3808.9 2827.67,3820.1 2740.27,3823.8 2953.87,3827.6 3355.47,3828.4 4296.67,3832.5 4618.37,3831.6 1855.17,3836.4 2255.67,3841.1 2638.27,3844.8 4459.47,3850.7 2415.67,3851.7 2560.87,3853.1 2078.37,3854.1 4618.17,3867.1 2899.37,3874.9 1925.17,3880.3 3408.87,3882 1531.47,3887.1 3004.47,3887.8 4617.97,3901.8 1855.77,3910.9 4296.67,3918.5 2932.27,3929.5 4459.47,3930.7 3631.37,3931.8 3458.57,3934.5 4617.97,3934.6 3553.87,3935.9 2056.67,3936.6 1926.87,3939.9 3827.47,3943.9 3979.07,3945.1 2645.27,3953.4 3067.97,3952.6 2147.27,3954.4 4617.97,3966.4 2858.87,3969.8 2826.27,3971.4 1963.47,3974.6 2691.27,3982.5 1857.87,3984.8 2971.57,3990.2 1536.87,3995.1 4617.97,3997.8 4459.07,4003.5 2896.27,4007.6 3138.57,4021.2 1891.37,4022.7 4386.07,4024.2 2690.17,4029.1 4617.77,4030.4 2020.27,4031.8 4078.37,4040.6 1800.67,4046.6 2971.97,4060.2 2561.37,4062.1 4617.67,4061.5 2291.07,4062.8 2430.67,4062.9 2169.57,4064.1 2651.67,4063.9 2743.37,4064.3 3526.27,4084.2 3596.57,4084 2899.07,4090.2 4617.97,4091.9 1536.27,4103.3 4079.27,4104.1 3224.67,4108 4618.17,4125.8 2973.37,4128.3 4448.37,4131.9 4008.27,4134.1 2686.37,4137.1 2562.07,4137.8 2155.57,4138.9 2421.17,4139.2 2277.17,4139.8 1854.77,4144.9 4617.87,4157.3 2901.57,4170.7 3017.57,4173.3 4618.47,4196.2 1536.17,4198.2 2719.97,4207.4 2056.37,4212 3062.37,4217 2958.57,4218 3307.57,4219.6 1920.27,4222.5 1688.77,4223.4 4617.97,4232.8 4425.57,4252.3 2698.67,4260.2 3112.37,4266 4618.07,4267.2 3015.57,4274 1536.97,4301.1 4618.17,4300.8 3910.47,4313.6 3161.87,4315.6 3072.07,4331 4295.57,4335.1 4105.57,4335.8 4618.27,4336 4618.27,4373.1 3964.87,4383.7 3133.07,4386.5 3398.47,4385.8 3537.77,4385.8 3685.57,4386.6 3834.17,4386.6 3264.87,4388 1536.97,4398.2 4618.07,4406.2 4618.37,4439.5 4618.37,4474 2346.47,4506.4 2441.37,4506.5 3201.37,4506.4 3296.27,4506.5 3718.07,4506.4 3812.97,4506.5 2146.47,4507.2 2243.57,4507.2 3001.37,4507.2 3098.47,4507.2 3404.47,4507.1 3518.07,4507.2 3615.17,4507.2 3921.17,4507.1 2559.97,4507.8 4223.67,4508.3 4318.57,4508.4 4023.67,4509.1 4120.77,4509.1 4426.77,4509 4618.37,4509.5
  other v2: 3861.3,3009.92 3900.67,3009.92 3940.04,3009.92 3861.3,3049.29 3940.04,3049.29 3861.3,3088.66 3900.67,3088.66 3940.04,3088.66
HEXT_IN: R3.1 T1.1 U1.47 | length 443.5
  Top Layer w8: U1.47@3989.25,2915.14 3989.25,2872.82 T1.1@4052.07,2810 4132.07,2730 4132.07,2557.1 R3.1@4150.67,2538.5
LD1: LD1.2 U4.10 | length 605.3
  Top Layer w8: LD1.2@1856.23,3595.24 1974.33,3595.24 2004.97,3564.6 2004.97,3281.4 2071.47,3214.9 U4.10@2071.5,3148.3
LD1_1: LD1.1 RP1.8 | length 112.3
  Top Layer w10: RP1.8@1699.4,3555.4 1755.39,3555.4 LD1.1@1795.23,3595.24
LD2: LD2.2 U4.11 | length 515.9
  Top Layer w8: LD2.2@1856.23,3520.5 1963.27,3520.5 1982.97,3500.8 1982.97,3273.4 2051.79,3204.58 U4.11@2051.82,3148.3
LD2_1: LD2.1 RP1.7 | length 95.8
  Top Layer w10: RP1.7@1699.4,3519.97 LD2.1@1795.23,3520.5
LD3: LD3.2 U4.12 | length 418.8
  Top Layer w8: LD3.2@1856.23,3445.8 1938.87,3445.8 1960.97,3423.7 1960.97,3265.4 2032.1,3194.27 U4.12@2032.13,3148.3
LD3_1: LD3.1 RP1.6 | length 111.9
  Top Layer w10: RP1.6@1699.4,3484.53 1756.5,3484.53 LD3.1@1795.23,3445.8
LD4: LD4.2 U4.19 | length 546
  Top Layer w8: LD4.2@1856.23,3370.1 1923.47,3370.1 1939.97,3353.6 1939.97,3256.4 2007.97,3188.4 2007.97,3113.4 2017.97,3103.4 2017.97,2978.4 2010.68,2971.11 U4.19@1973.05,2971.11
LD4_1: LD4.1 RP1.5 | length 164.3
  Top Layer w10: RP1.5@1699.4,3449.1 1742.37,3449.1 1750.37,3441.1 1750.37,3380.1 1760.37,3370.1 LD4.1@1795.23,3370.1
M-ATLK_RX: R33.2 U4.31 | length 125.5
  Top Layer w10: U4.31@2150.24,2813.65 2150.21,2739.96 R33.2@2186.87,2703.3
M-ATLK_TX: R32.2 U4.30 | length 111.6
  Top Layer w10: U4.30@2130.53,2813.63 2130.53,2706.34 R32.2@2133.57,2703.3
M-NRST: C39.1 P1.4 U4.7 | length 1481.1
  Top Layer w6: U4.7@2130.56,3148.3 2130.56,3112.81 v1(2232.67,3010.6)
  Top Layer w10: C39.1@2126.57,3266.4 2126.59,3239.92 2126.59,3192.78 2130.53,3188.84 U4.7@2130.53,3148.28
  Bottom Layer w6: P1.4@1618.57,2582.3 1677.36,2641.1 2274.17,2641.1 2330.27,2697.2 2330.27,2999 2297.17,3032.1 2254.17,3032.1 v1(2232.67,3010.6)
M-SWCLK: P1.3 U4.37 | length 891
  Top Layer w10: U4.37@2307.73,2872.71 2307.7,2845.57 v1(2307.97,2845.3)
  Bottom Layer w6: P1.3@1618.57,2682.3 1676.56,2682.31 1702.37,2656.5 2264.67,2656.5 2307.97,2699.8 v1(2307.97,2845.3)
M-SWDIO: P1.2 U4.34 | length 782.7
  Top Layer w6: U4.34@2209.3,2813.65 2209.3,2738.2 2218.57,2728.93 v1(2218.57,2678)
  Bottom Layer w6: P1.2@1618.57,2782.3 1722.88,2678 v1(2218.57,2678)
M-USB_D+: R24.2 U4.33 | length 1559.6
  Top Layer w8: v2(1927.57,4017) R24.2@1927.57,4055.5
  Top Layer w10: U4.33@2189.61,2813.65 2189.58,2847.51 v1(2198.87,2856.8)
  Bottom Layer w6: v2(1927.57,4017) 1881.57,3971 1881.57,2916.2 1955.87,2841.9 2183.97,2841.9 v1(2198.87,2856.8)
M-USB_D-: R25.2 U4.32 | length 1524.7
  Top Layer w8: v2(1928.17,3979) 1983.57,4034.4 R25.2@1983.57,4056.1
  Top Layer w10: U4.32@2169.93,2813.65 2169.9,2867.53 v1(2170.37,2868)
  Bottom Layer w6: v2(1928.17,3979) 1899.37,3950.2 1899.37,2924.1 1966.37,2857.1 2159.47,2857.1 v1(2170.37,2868)
M_ATLK_BLE_RST: R4.2 U4.29 | length 122.7
  Top Layer w6: R4.2@2080.97,2703.3 2080.97,2731.2 2110.87,2761.1 U4.29@2110.87,2813.65
M_ATLK_BOOT0: R30.2 U4.27 | length 180
  Top Layer w6: R30.2@1974.87,2703.3 1974.87,2722.8 1986.07,2734 2036.57,2734 2071.5,2768.93 U4.27@2071.5,2813.65
M_ATLK_MCU_RST: R31.2 U4.28 | length 136.4
  Top Layer w6: R31.2@2028.37,2703.3 2091.19,2766.12 U4.28@2091.19,2813.65
M_ATLK_SWCLK: R35.2 U4.25 | length 232.9
  Top Layer w6: R35.2@1867.47,2703.3 1927.77,2763.6 2020.57,2763.6 2032.13,2775.16 U4.25@2032.13,2813.65
M_ATLK_SWDIO: R36.2 U4.26 | length 200.9
  Top Layer w6: R36.2@1921.37,2703.3 1966.37,2748.3 2028.77,2748.3 2051.82,2771.35 U4.26@2051.82,2813.65
M_ATLK_SWO: R34.2 U4.13 | length 584.5
  Top Layer w8: R34.2@1813.97,2703.7 1777.07,2740.6 1777.07,3068.2 1798.11,3089.24 U4.13@1973.08,3089.24
M_MISO: R27.2 U4.40 | length 342.7
  Top Layer w6: U4.40@2307.72,2931.76 2406.01,2931.76 2444.47,2893.3 R27.2@2444.47,2703.29
M_MOSI: R26.2 U4.41 | length 392.2
  Top Layer w6: U4.41@2307.73,2951.45 2418.62,2951.45 2466.17,2903.9 2466.17,2735.69 R26.2@2498.57,2703.29
M_NSS: R29.2 U4.38 | length 291.5
  Top Layer w6: U4.38@2307.72,2892.39 2377.98,2892.39 2395.47,2874.9 2395.47,2763.49 R29.2@2335.27,2703.29